# EAGLE board 6up-PA1 (EAGLE 9.4.2)
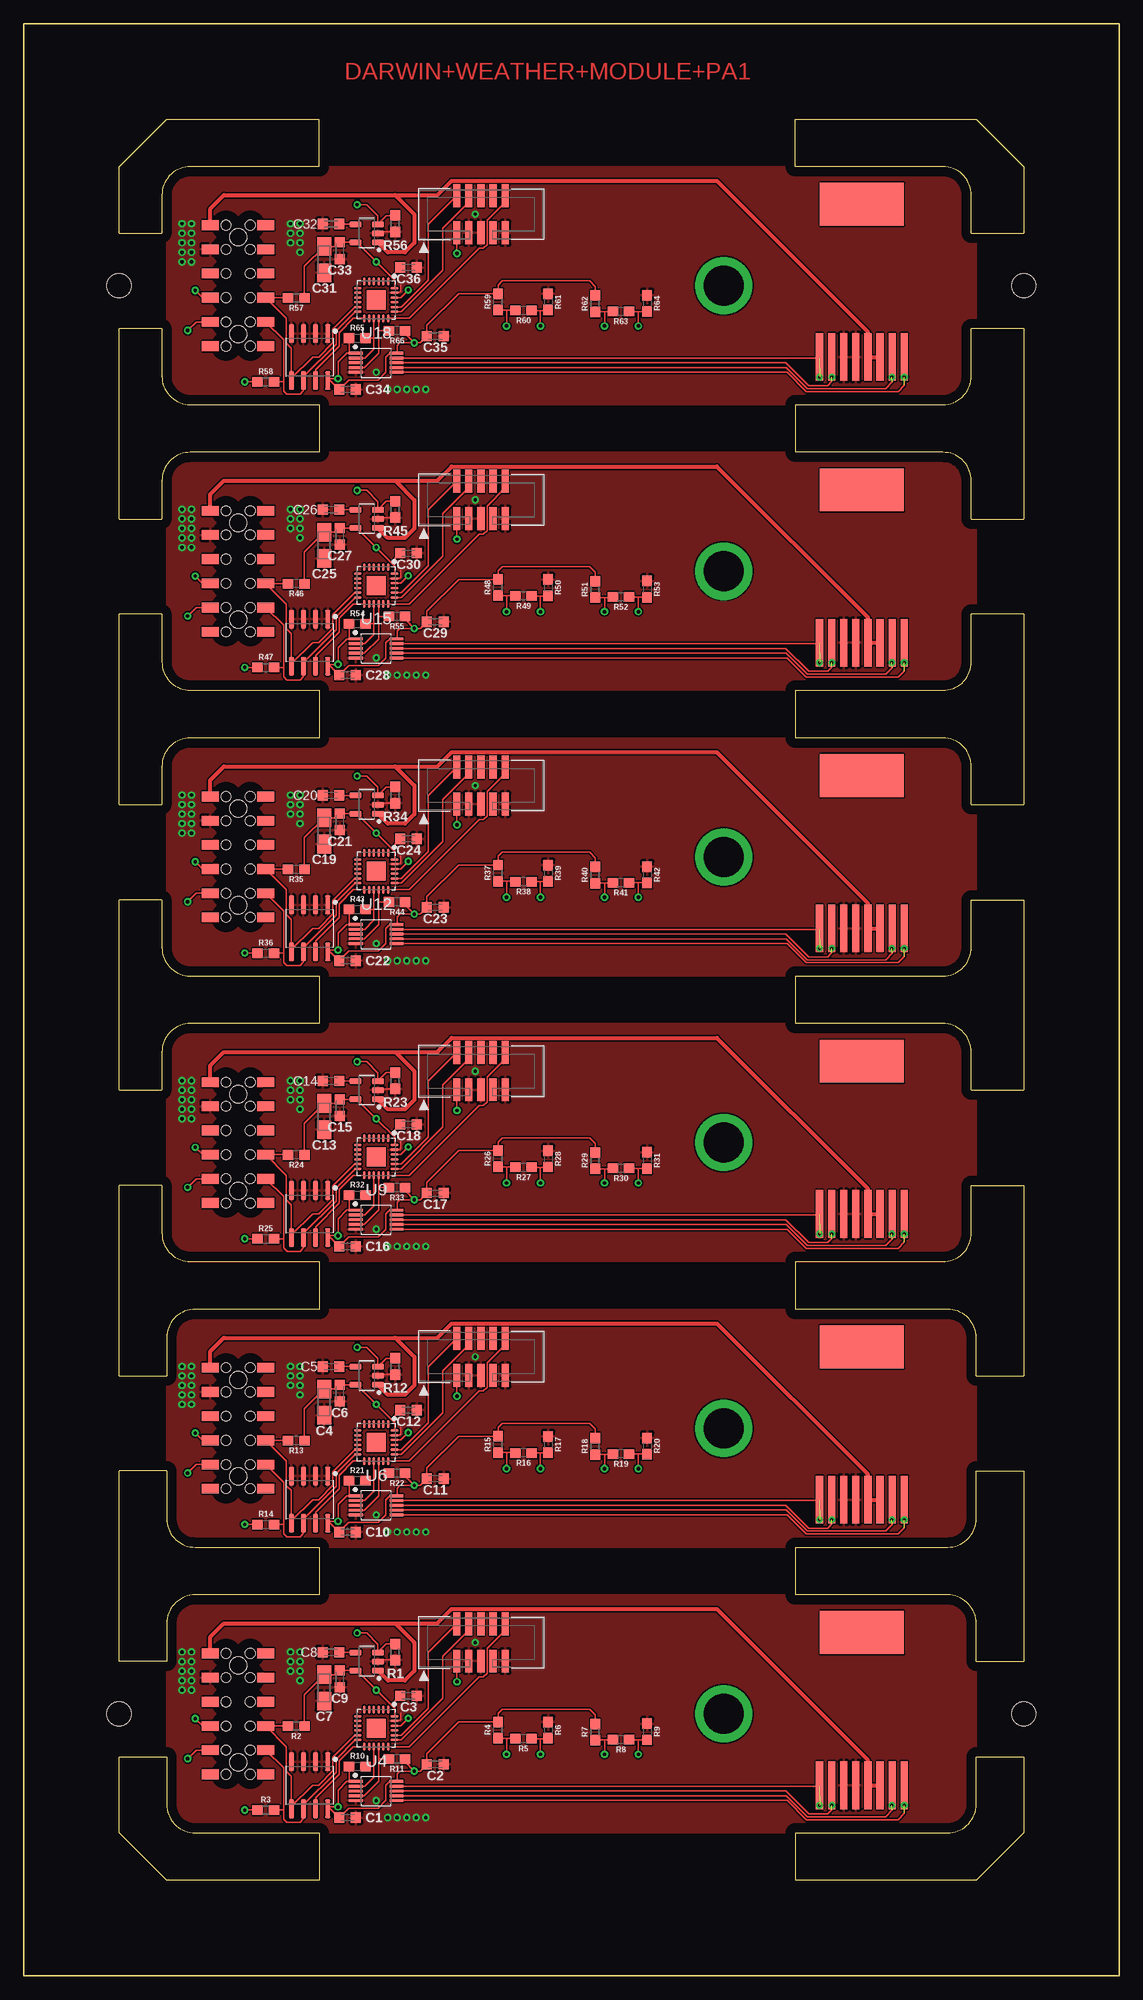
[diagram p0: board, top side]
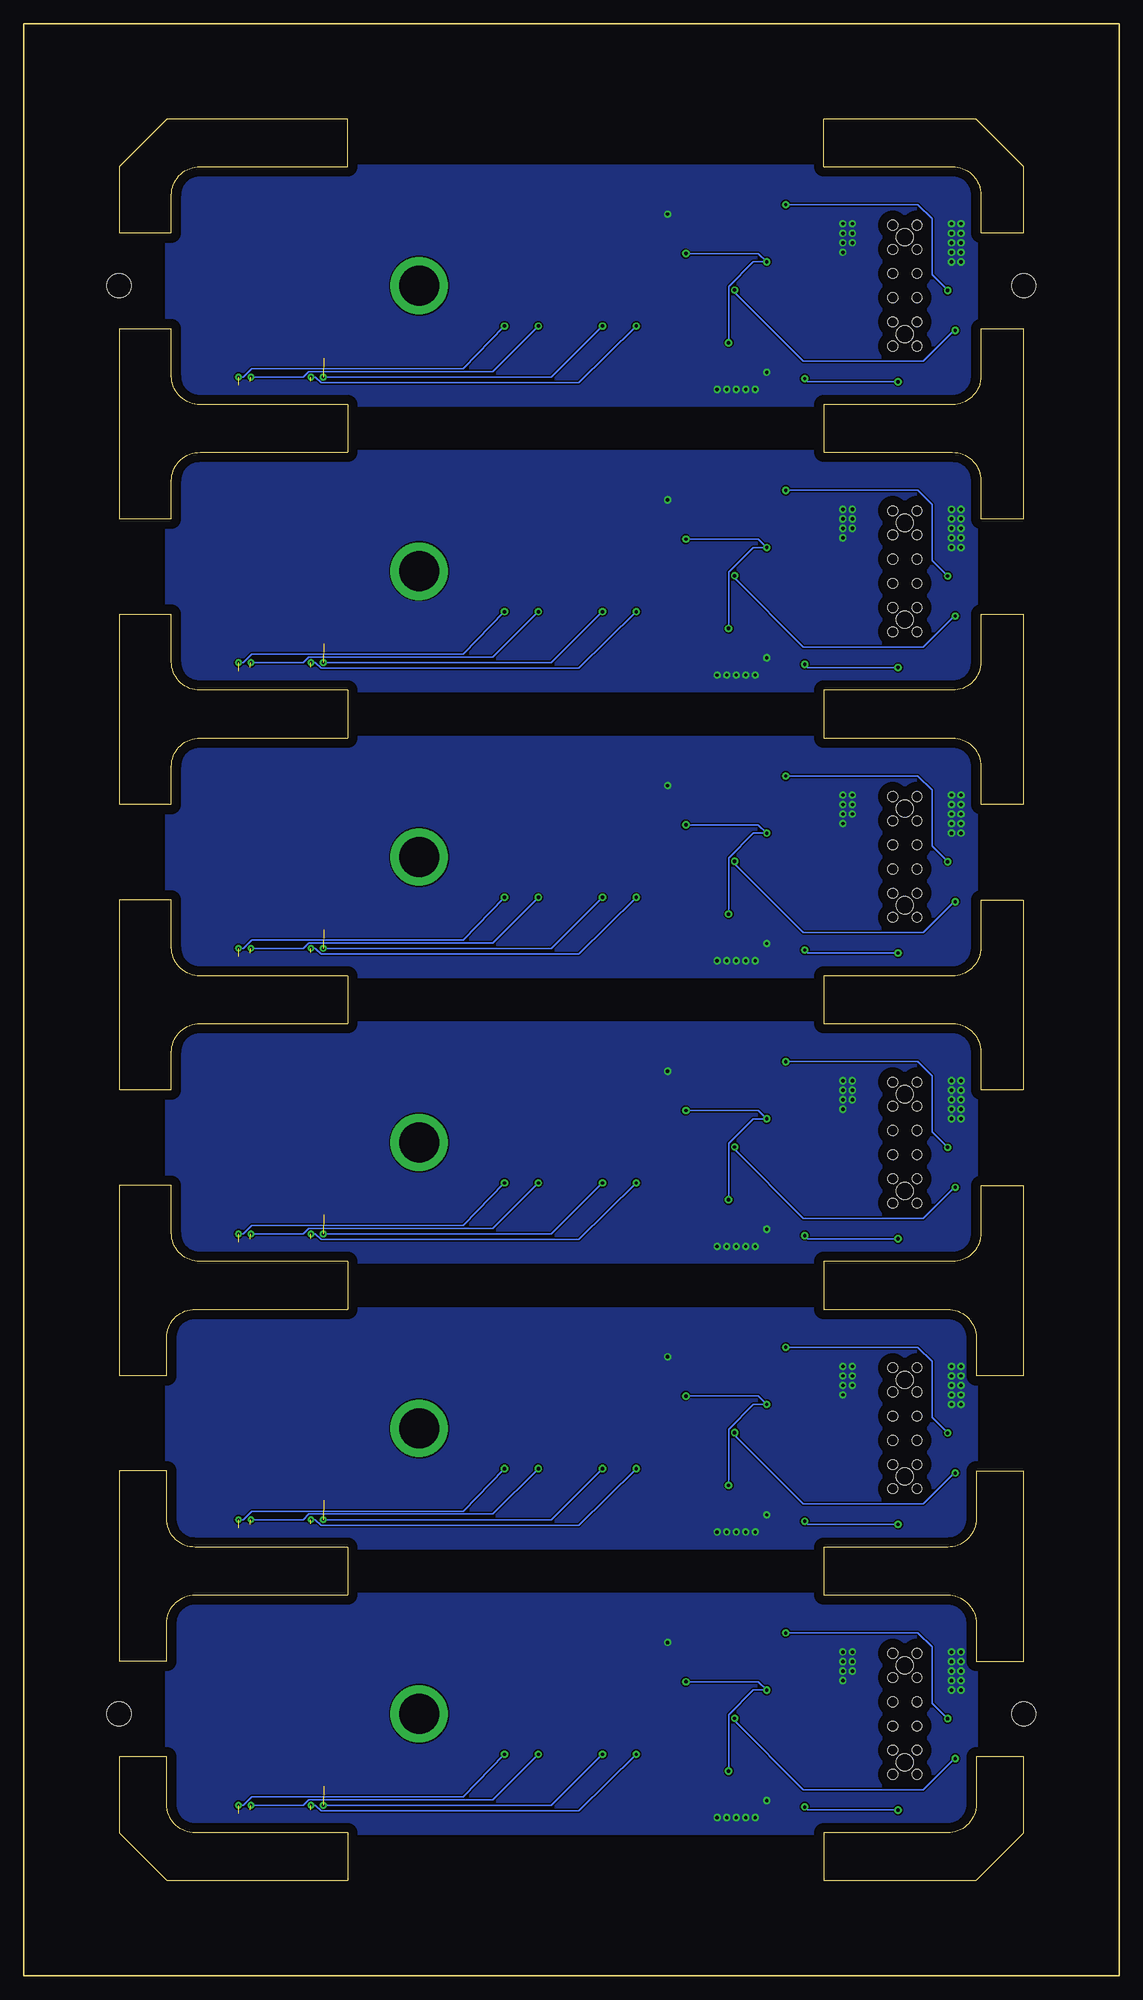
[diagram p1: board, bottom side, seen from below]

Size 115 x 205 mm. Coordinates in mm from the lower left corner, seen from the top.
Outline: 81,10 100,10 105,15 105,23 100,23 100,18 arc-90 97,15 81,15 81,10
Outline: 81,10 81,10
Outline: 15,18 arc90 18,15 31,15 31,10 15,10 10,15 10,23 15,23 15,18
Outline: 100,37 arc90 97,40 81,40 81,45 97,45 arc90 100,48 100,53 105,53 105,33 100,33 100,37
Outline: 18,40 arc90 15,37 15,33 10,33 10,53 15,53 15,48 arc90 18,45 31,45 31,40 18,40
Outline: 100,67 arc90 97,70 81,70 81,75 96.5,75 arc90 99.5,78 99.5,83 105,83 105,63 100,63 100,67
Outline: 18,70 arc90 15,67 15,63 10,63 10,83 14.5,83 14.5,78 arc90 17.5,75 31,75 31,70 18,70
Outline: 99.5,97 arc90 96.5,100 81,100 81,105 96.5,105 arc90 99.5,108 99.5,113 105,113 105,93 99.5,93 99.5,97
Outline: 17.5,100 arc90 14.5,97 14.5,93 10,93 10,113 14.5,113 14.5,108 arc90 17.5,105 31,105 31,100 17.5,100
Outline: 99.5,127 arc90 96.5,130 81,130 81,135 96.5,135 arc90 99.5,138 99.5,143 105,143 105,123 99.5,123 99.5,127
Outline: 17.5,130 arc90 14.5,127 14.5,123 10,123 10,143 14.5,143 14.5,138 arc90 17.5,135 31,135 31,130 17.5,130
Outline: 99.5,157 arc90 96.5,160 81,160 81,165 96.5,165 arc90 99.5,168 99.5,173 105,173 105,153 99.5,153 99.5,157
Outline: 17.5,160 arc90 14.5,157 14.5,153 10,153 10,173 14.5,173 14.5,168 arc90 17.5,165 31,165 31,160 17.5,160
Outline: 99.5,187 arc90 96.5,190 81,190 81,195 100,195 105,190 105,183 99.5,183 99.5,187
Outline: 17.5,190 arc90 14.5,187 14.5,183 10,183 10,190 15,195 31,195 31,190 17.5,190
Outline: 0,0 115,0 115,205 0,205 0,0
Copper layers (1*16): Top 0.035mm / dielectric 1.5mm / Bottom 0.035mm
Design rules "default *": minimum track width 6mil, minimum drill 0.35mm, track to track 6mil, track to pad 6mil, pad to pad 6mil, via to via 6mil, smd to smd 6mil, copper to edge 40mil, drill to drill 6mil, minimum pad ring 10mil, minimum via ring 8mil, stop-mask expansion 4mil, vias tented up to drill 0.35mm, thermal gap 10mil
Holes 2.54 mm at 10,177.5 105,177.5 10,27.5 105,27.5

## Footprints (pad centres in the part's own frame; a part is rotated, then mirrored left to right if it is on the bottom)
C0603K = smd 1.05 x 1.08: 1 -0.875,0; 2 0.875,0
A/3216-18R = smd 1.95 x 1.5: + 1.375,0; - -1.375,0
M20-7810645 = smd 1.02 x 1.78: P$1 -6.35,-2.91; P$2 -3.81,-2.91; P$3 -1.27,-2.91; P$4 1.27,-2.91; P$5 3.81,-2.91; P$6 6.35,-2.91; P$7 6.35,2.91; P$8 3.81,2.91; P$9 1.27,2.91; P$10 -1.27,2.91; P$11 -3.81,2.91; P$12 -6.35,2.91 | hole 1.02: -6.35,1.27; -3.81,1.27; -1.27,1.27; 1.27,1.27; 3.81,1.27; 6.35,1.27; 6.35,-1.27; 3.81,-1.27; 1.27,-1.27; -1.27,-1.27; -3.81,-1.27; -6.35,-1.27 | hole 1.8: -5.08,0; 5.08,0
85513-5009 = smd 0.76 x 5: 1 4.445,0; 2 3.175,0; 3 1.905,0; 4 0.635,0; 5 -0.635,0; 6 -1.905,0; 7 -3.175,0; 8 -4.445,0 | smd 8.8 x 4.5: P$1 0,16.05
0603 = smd 1.1 x 1: 1 -0.85,0; 2 0.85,0
QFN50P400X400X100-25T200 = smd 0.837 x 0.27: 1 -1.937,1.25; 2 -1.937,0.75; 3 -1.937,0.25; 4 -1.937,-0.25; 5 -1.937,-0.75; 6 -1.937,-1.25; 13 1.937,-1.25; 14 1.937,-0.75; 15 1.937,-0.25; 16 1.937,0.25; 17 1.937,0.75; 18 1.937,1.25 | smd 0.27 x 0.837: 7 -1.25,-1.937; 8 -0.75,-1.937; 9 -0.25,-1.937; 10 0.25,-1.937; 11 0.75,-1.937; 12 1.25,-1.937; 19 1.25,1.937; 20 0.75,1.937; 21 0.25,1.937; 22 -0.25,1.937; 23 -0.75,1.937; 24 -1.25,1.937 | smd 2 x 2: 25 0,0
SOIC127P600X175-8 = smd 1.968 x 0.569: 1 -2.473,1.905; 2 -2.473,0.635; 3 -2.473,-0.635; 4 -2.473,-1.905; 5 2.473,-1.905; 6 2.473,-0.635; 7 2.473,0.635; 8 2.473,1.905
SOP50P490X110-10 = smd 1.438 x 0.297: 1 -2.145,1; 2 -2.145,0.5; 3 -2.145,0; 4 -2.145,-0.5; 5 -2.145,-1; 6 2.145,-1; 7 2.145,-0.5; 8 2.145,0; 9 2.145,0.5; 10 2.145,1
SOT95P280X145-5 = smd 1.262 x 0.609: 1 -1.175,0.95; 2 -1.175,0; 3 -1.175,-0.95; 4 1.175,-0.95; 5 1.175,0.95
2X05_1.27MM_BOX_NOPOSTS = smd 0.76 x 2.4: 1 -2.54,-1.95; 2 -2.54,1.95; 3 -1.27,-1.95; 4 -1.27,1.95; 5 0,-1.95; 6 0,1.95; 7 1.27,-1.95; 8 1.27,1.95; 9 2.54,-1.95; 10 2.54,1.95

## Placement (x,y rotation side)
C1  .1uf  [C0603K]  34,16.6 0 top
C2  .1uf  [C0603K]  43.2,22.2 0 top
C3  .1uf  [C0603K]  40.4,29.4 0 top
C4  6.8uf  [A/3216-18R]  31.54,60.23 90 top
C5  [C0603K]  32.25,63.97 180 top
C6  .1uf  [C0603K]  33.17,61.17 270 top
C7  6.8uf  [A/3216-18R]  31.54,30.23 90 top
C8  [C0603K]  32.25,33.97 180 top
C9  .1uf  [C0603K]  33.17,31.18 270 top
C10  .1uf  [C0603K]  34,46.6 0 top
C11  .1uf  [C0603K]  43.2,52.2 0 top
C12  .1uf  [C0603K]  40.4,59.4 0 top
C13  6.8uf  [A/3216-18R]  31.54,90.23 90 top
C14  [C0603K]  32.25,93.97 180 top
C15  .1uf  [C0603K]  33.17,91.17 270 top
C16  .1uf  [C0603K]  34,76.6 0 top
C17  .1uf  [C0603K]  43.2,82.2 0 top
C18  .1uf  [C0603K]  40.4,89.4 0 top
C19  6.8uf  [A/3216-18R]  31.54,120.23 90 top
C20  [C0603K]  32.25,123.97 180 top
C21  .1uf  [C0603K]  33.17,121.17 270 top
C22  .1uf  [C0603K]  34,106.6 0 top
C23  .1uf  [C0603K]  43.2,112.2 0 top
C24  .1uf  [C0603K]  40.4,119.4 0 top
C25  6.8uf  [A/3216-18R]  31.54,150.23 90 top
C26  [C0603K]  32.25,153.97 180 top
C27  .1uf  [C0603K]  33.17,151.18 270 top
C28  .1uf  [C0603K]  34,136.6 0 top
C29  .1uf  [C0603K]  43.2,142.2 0 top
C30  .1uf  [C0603K]  40.4,149.4 0 top
C31  6.8uf  [A/3216-18R]  31.54,180.23 90 top
C32  [C0603K]  32.25,183.97 180 top
C33  .1uf  [C0603K]  33.17,181.18 270 top
C34  .1uf  [C0603K]  34,166.6 0 top
C35  .1uf  [C0603K]  43.2,172.2 0 top
C36  .1uf  [C0603K]  40.4,179.4 0 top
J1  2X6-HEADERS  [M20-7810645]  22.5,27.5 90 top
J2  95501-6889VERT  [85513-5009]  88,20 0 top
J3  2X6-HEADERS  [M20-7810645]  22.5,57.5 90 top
J4  95501-6889VERT  [85513-5009]  88,50 0 top
J5  2X6-HEADERS  [M20-7810645]  22.5,87.5 90 top
J6  95501-6889VERT  [85513-5009]  88,80 0 top
J7  2X6-HEADERS  [M20-7810645]  22.5,117.5 90 top
J8  95501-6889VERT  [85513-5009]  88,110 0 top
J9  2X6-HEADERS  [M20-7810645]  22.5,147.5 90 top
J10  95501-6889VERT  [85513-5009]  88,140 0 top
J11  2X6-HEADERS  [M20-7810645]  22.5,177.5 90 top
J12  95501-6889VERT  [85513-5009]  88,170 0 top
R1  100k  [0603]  39,34 90 top
R2  4.7k  [0603]  28.6,26.2 180 top
R3  4.7k  [0603]  25.4,17.4 0 top
R4  330  [0603]  49.8,25.8 90 top
R5  100  [0603]  52.46,24.89 180 top
R6  300  [0603]  55.06,25.79 270 top
R7  330  [0603]  60,25.6 90 top
R8  100  [0603]  62.69,24.79 180 top
R9  300  [0603]  65.45,25.62 270 top
R10  4.7k  [0603]  35.02,21.98 0 top
R11  4.7k  [0603]  39.18,22.76 180 top
R12  100k  [0603]  39,64 90 top
R13  4.7k  [0603]  28.6,56.2 180 top
R14  4.7k  [0603]  25.4,47.4 0 top
R15  330  [0603]  49.8,55.8 90 top
R16  100  [0603]  52.46,54.9 180 top
R17  300  [0603]  55.06,55.79 270 top
R18  330  [0603]  60,55.6 90 top
R19  100  [0603]  62.69,54.79 180 top
R20  300  [0603]  65.45,55.62 270 top
R21  4.7k  [0603]  35.02,51.98 0 top
R22  4.7k  [0603]  39.18,52.76 180 top
R23  100k  [0603]  39,94 90 top
R24  4.7k  [0603]  28.6,86.2 180 top
R25  4.7k  [0603]  25.4,77.4 0 top
R26  330  [0603]  49.8,85.8 90 top
R27  100  [0603]  52.46,84.89 180 top
R28  300  [0603]  55.06,85.79 270 top
R29  330  [0603]  60,85.6 90 top
R30  100  [0603]  62.69,84.79 180 top
R31  300  [0603]  65.45,85.62 270 top
R32  4.7k  [0603]  35.02,81.98 0 top
R33  4.7k  [0603]  39.18,82.76 180 top
R34  100k  [0603]  39,124 90 top
R35  4.7k  [0603]  28.6,116.2 180 top
R36  4.7k  [0603]  25.4,107.4 0 top
R37  330  [0603]  49.8,115.8 90 top
R38  100  [0603]  52.46,114.89 180 top
R39  300  [0603]  55.06,115.79 270 top
R40  330  [0603]  60,115.6 90 top
R41  100  [0603]  62.69,114.79 180 top
R42  300  [0603]  65.45,115.62 270 top
R43  4.7k  [0603]  35.02,111.98 0 top
R44  4.7k  [0603]  39.18,112.76 180 top
R45  100k  [0603]  39,154 90 top
R46  4.7k  [0603]  28.6,146.2 180 top
R47  4.7k  [0603]  25.4,137.4 0 top
R48  330  [0603]  49.8,145.8 90 top
R49  100  [0603]  52.46,144.9 180 top
R50  300  [0603]  55.06,145.79 270 top
R51  330  [0603]  60,145.6 90 top
R52  100  [0603]  62.69,144.79 180 top
R53  300  [0603]  65.45,145.62 270 top
R54  4.7k  [0603]  35.02,141.98 0 top
R55  4.7k  [0603]  39.18,142.76 180 top
R56  100k  [0603]  39,184 90 top
R57  4.7k  [0603]  28.6,176.2 180 top
R58  4.7k  [0603]  25.4,167.4 0 top
R59  330  [0603]  49.8,175.8 90 top
R60  100  [0603]  52.46,174.9 180 top
R61  300  [0603]  55.06,175.79 270 top
R62  330  [0603]  60,175.6 90 top
R63  100  [0603]  62.69,174.79 180 top
R64  300  [0603]  65.45,175.62 270 top
R65  4.7k  [0603]  35.02,171.98 0 top
R66  4.7k  [0603]  39.18,172.76 180 top
U1  ATSAMD09  [QFN50P400X400X100-25T200]  37,56 270 top
U2  ATSAMD09  [QFN50P400X400X100-25T200]  37,26 270 top
U3  M24C02-WMN6TP  [SOIC127P600X175-8]  30,20 270 top
U4  PCA9615  [SOP50P490X110-10]  37,19.4 0 top
U5  M24C02-WMN6TP  [SOIC127P600X175-8]  30,50 270 top
U6  PCA9615  [SOP50P490X110-10]  37,49.4 0 top
U7  ATSAMD09  [QFN50P400X400X100-25T200]  37,86 270 top
U8  M24C02-WMN6TP  [SOIC127P600X175-8]  30,80 270 top
U9  PCA9615  [SOP50P490X110-10]  37,79.4 0 top
U10  ATSAMD09  [QFN50P400X400X100-25T200]  37,116 270 top
U11  M24C02-WMN6TP  [SOIC127P600X175-8]  30,110 270 top
U12  PCA9615  [SOP50P490X110-10]  37,109.4 0 top
U13  ATSAMD09  [QFN50P400X400X100-25T200]  37,146 270 top
U14  M24C02-WMN6TP  [SOIC127P600X175-8]  30,140 270 top
U15  PCA9615  [SOP50P490X110-10]  37,139.4 0 top
U16  ATSAMD09  [QFN50P400X400X100-25T200]  37,176 270 top
U17  M24C02-WMN6TP  [SOIC127P600X175-8]  30,170 270 top
U18  PCA9615  [SOP50P490X110-10]  37,169.4 0 top
U$1  MIC5219-3.3YM5-TR  [SOT95P280X145-5]  36,63 180 top
U$2  MIC5219-3.3YM5-TR  [SOT95P280X145-5]  36,93 180 top
U$3  MIC5219-3.3YM5-TR  [SOT95P280X145-5]  36,123 180 top
U$4  MIC5219-3.3YM5-TR  [SOT95P280X145-5]  36,33 180 top
U$5  MIC5219-3.3YM5-TR  [SOT95P280X145-5]  36,153 180 top
U$6  MIC5219-3.3YM5-TR  [SOT95P280X145-5]  36,183 180 top
X1  [2X05_1.27MM_BOX_NOPOSTS]  48,35 0 top
X2  [2X05_1.27MM_BOX_NOPOSTS]  48,65 0 top
X3  [2X05_1.27MM_BOX_NOPOSTS]  48,95 0 top
X4  [2X05_1.27MM_BOX_NOPOSTS]  48,125 0 top
X5  [2X05_1.27MM_BOX_NOPOSTS]  48,155 0 top
X6  [2X05_1.27MM_BOX_NOPOSTS]  48,185 0 top

## Library data of the parts
C1-C36 = rcl; SPICEPREFIX: C
J1-J12 U1-U18 U$1-U$6 = Conservify
R1-R66 = SparkFun-Resistors; PROD_ID: RES-07828
X1-X6 = microbuilder

## Nets
3V1: C4.+ C6.1 C10.1 C11.1 C12.1 R13.1 R14.1 R15.2 R18.2 R21.1 R22.1 U1.24 U5.8 U6.1 U6.10 U$1.5 X2.1
3V2: C13.+ C15.1 C16.1 C17.1 C18.1 R24.1 R25.1 R26.2 R29.2 R32.1 R33.1 U7.24 U8.8 U9.1 U9.10 U$2.5 X3.1
3V3: C1.1 C2.1 C3.1 C7.+ C9.1 R2.1 R3.1 R4.2 R7.2 R10.1 R11.1 U2.24 U3.8 U4.1 U4.10 U$4.5 X1.1
3V4: C19.+ C21.1 C22.1 C23.1 C24.1 R35.1 R36.1 R37.2 R40.2 R43.1 R44.1 U10.24 U11.8 U12.1 U12.10 U$3.5 X4.1
3V5: C25.+ C27.1 C28.1 C29.1 C30.1 R46.1 R47.1 R48.2 R51.2 R54.1 R55.1 U13.24 U14.8 U15.1 U15.10 U$5.5 X5.1
3V6: C31.+ C33.1 C34.1 C35.1 C36.1 R57.1 R58.1 R59.2 R62.2 R65.1 R66.1 U16.24 U17.8 U18.1 U18.10 U$6.5 X6.1
EN: U4.3
EN1: U6.3
EN2: U9.3
EN3: U12.3
EN4: U15.3
EN5: U18.3
ENABLE: J1.P$10 R1.2 U$4.3
ENABLE1: J3.P$10 R12.2 U$1.3
ENABLE2: J5.P$10 R23.2 U$2.3
ENABLE3: J7.P$10 R34.2 U$3.3
ENABLE4: J9.P$10 R45.2 U$5.3
ENABLE5: J11.P$10 R56.2 U$6.3
G1: J1.P$11 U2.22
G2: J1.P$12
G3: J3.P$11 U1.22
G4: J3.P$12
G5: J5.P$11 U7.22
G6: J5.P$12
G7: J7.P$11 U10.22
G8: J7.P$12
G9: J9.P$11 U13.22
G10: J9.P$12
G11: J11.P$11 U16.22
G12: J11.P$12
GND: C1.2 C2.2 C3.2 C7.- C8.2 C9.2 J1.P$8 J2.5 J2.6 R1.1 R6.1 R9.1 U2.23 U3.1 U3.2 U3.3 U3.4 U4.5 U$4.2 X1.3 X1.5 X1.9
GND1: C4.- C5.2 C6.2 C10.2 C11.2 C12.2 J3.P$8 J4.5 J4.6 R12.1 R17.1 R20.1 U1.23 U5.1 U5.2 U5.3 U5.4 U6.5 U$1.2 X2.3 X2.5 X2.9
GND2: C13.- C14.2 C15.2 C16.2 C17.2 C18.2 J5.P$8 J6.5 J6.6 R23.1 R28.1 R31.1 U7.23 U8.1 U8.2 U8.3 U8.4 U9.5 U$2.2 X3.3 X3.5 X3.9
GND3: C19.- C20.2 C21.2 C22.2 C23.2 C24.2 J7.P$8 J8.5 J8.6 R34.1 R39.1 R42.1 U10.23 U11.1 U11.2 U11.3 U11.4 U12.5 U$3.2 X4.3 X4.5 X4.9
GND4: C25.- C26.2 C27.2 C28.2 C29.2 C30.2 J9.P$8 J10.5 J10.6 R45.1 R50.1 R53.1 U13.23 U14.1 U14.2 U14.3 U14.4 U15.5 U$5.2 X5.3 X5.5 X5.9
GND5: C31.- C32.2 C33.2 C34.2 C35.2 C36.2 J11.P$8 J12.5 J12.6 R56.1 R61.1 R64.1 U16.23 U17.1 U17.2 U17.3 U17.4 U18.5 U$6.2 X6.3 X6.5 X6.9
IN3V1: J3.P$9
IN3V2: J5.P$9
IN3V3: J1.P$9
IN3V4: J7.P$9
IN3V5: J9.P$9
IN3V6: J11.P$9
KEY: X1.7
KEY1: X2.7
KEY2: X3.7
KEY3: X4.7
KEY4: X5.7
KEY5: X6.7
LCL-M: J2.1 R8.1 R9.2 U4.6
LCL-M1: J4.1 R19.1 R20.2 U6.6
LCL-M2: J6.1 R30.1 R31.2 U9.6
LCL-M3: J8.1 R41.1 R42.2 U12.6
LCL-M4: J10.1 R52.1 R53.2 U15.6
LCL-M5: J12.1 R63.1 R64.2 U18.6
LCL-P: J2.2 R7.1 R8.2 U4.7
LCL-P1: J4.2 R18.1 R19.2 U6.7
LCL-P2: J6.2 R29.1 R30.2 U9.7
LCL-P3: J8.2 R40.1 R41.2 U12.7
LCL-P4: J10.2 R51.1 R52.2 U15.7
LCL-P5: J12.2 R62.1 R63.2 U18.7
LDA-M: J2.8 R5.1 R6.2 U4.9
LDA-M1: J4.8 R16.1 R17.2 U6.9
LDA-M2: J6.8 R27.1 R28.2 U9.9
LDA-M3: J8.8 R38.1 R39.2 U12.9
LDA-M4: J10.8 R49.1 R50.2 U15.9
LDA-M5: J12.8 R60.1 R61.2 U18.9
LDA-P: J2.7 R4.1 R5.2 U4.8
LDA-P1: J4.7 R15.1 R16.2 U6.8
LDA-P2: J6.7 R26.1 R27.2 U9.8
LDA-P3: J8.7 R37.1 R38.2 U12.8
LDA-P4: J10.7 R48.1 R49.2 U15.8
LDA-P5: J12.7 R59.1 R60.2 U18.8
MISO: J1.P$4
MISO1: J3.P$4
MISO2: J5.P$4
MISO3: J7.P$4
MISO4: J9.P$4
MISO5: J11.P$4
MOSI: J1.P$5
MOSI1: J3.P$5
MOSI2: J5.P$5
MOSI3: J7.P$5
MOSI4: J9.P$5
MOSI5: J11.P$5
N$3: C5.1 U$1.4
N$5: C14.1 U$2.4
N$6: C8.1 U$4.4
N$8: C20.1 U$3.4
N$10: C26.1 U$5.4
N$12: C32.1 U$6.4
NC: J1.P$1
NC1: J3.P$1
NC2: J5.P$1
NC3: J7.P$1
NC4: J9.P$1
NC5: J11.P$1
RESET: U2.18 X1.10
RESET1: U1.18 X2.10
RESET2: U7.18 X3.10
RESET3: U10.18 X4.10
RESET4: U13.18 X5.10
RESET5: U16.18 X6.10
SCK: J1.P$6
SCK1: J3.P$6
SCK2: J5.P$6
SCK3: J7.P$6
SCK4: J9.P$6
SCK5: J11.P$6
SCL: J1.P$2 R3.2 U2.12 U3.6
SCL1: J3.P$2 R14.2 U1.12 U5.6
SCL2: J5.P$2 R25.2 U7.12 U8.6
SCL3: J7.P$2 R36.2 U10.12 U11.6
SCL4: J9.P$2 R47.2 U13.12 U14.6
SCL5: J11.P$2 R58.2 U16.12 U17.6
SDA: J1.P$3 R2.2 U2.11 U3.5
SDA1: J3.P$3 R13.2 U1.11 U5.5
SDA2: J5.P$3 R24.2 U7.11 U8.5
SDA3: J7.P$3 R35.2 U10.11 U11.5
SDA4: J9.P$3 R46.2 U13.11 U14.5
SDA5: J11.P$3 R57.2 U16.11 U17.5
SENSE-SCL: R11.2 U2.16 U4.4
SENSE-SCL1: R22.2 U1.16 U6.4
SENSE-SCL2: R33.2 U7.16 U9.4
SENSE-SCL3: R44.2 U10.16 U12.4
SENSE-SCL4: R55.2 U13.16 U15.4
SENSE-SCL5: R66.2 U16.16 U18.4
SENSE-SDA: R10.2 U2.15 U4.2
SENSE-SDA1: R21.2 U1.15 U6.2
SENSE-SDA2: R32.2 U7.15 U9.2
SENSE-SDA3: R43.2 U10.15 U12.2
SENSE-SDA4: R54.2 U13.15 U15.2
SENSE-SDA5: R65.2 U16.15 U18.2
SWCLK: U2.19 X1.4
SWCLK1: U1.19 X2.4
SWCLK2: U7.19 X3.4
SWCLK3: U10.19 X4.4
SWCLK4: U13.19 X5.4
SWCLK5: U16.19 X6.4
SWDIO: U2.20 X1.2
SWDIO1: U1.20 X2.2
SWDIO2: U7.20 X3.2
SWDIO3: U10.20 X4.2
SWDIO4: U13.20 X5.2
SWDIO5: U16.20 X6.2
SWO: X1.6
SWO1: X2.6
SWO2: X3.6
SWO3: X4.6
SWO4: X5.6
SWO5: X6.6
TDI: X1.8
TDI1: X2.8
TDI2: X3.8
TDI3: X4.8
TDI4: X5.8
TDI5: X6.8
UNREG: J1.P$7 J2.3 J2.4 U$4.1
UNREG1: J3.P$7 J4.3 J4.4 U$1.1
UNREG2: J5.P$7 J6.3 J6.4 U$2.1
UNREG3: J7.P$7 J8.3 J8.4 U$3.1
UNREG4: J9.P$7 J10.3 J10.4 U$5.1
UNREG5: J11.P$7 J12.3 J12.4 U$6.1
WC: U2.13 U3.7
WC1: U1.13 U5.7
WC2: U7.13 U8.7
WC3: U10.13 U11.7
WC4: U13.13 U14.7
WC5: U16.13 U17.7

## Tracks (layer width: path | path; a pad name or v marks a point on that pad's centre or on a via)
3V1  (via drill 0.35)
  Top 0.152: 38.94,58.06 v37,60 34.95,62.05 U$1.5 C6.1 32.73,61.61 C4.+ 29.45,59.52 R13.1 | 38.94,58.06 U1.24 | v45.48,60.88 45.46,60.9 X2.1 | C12.1 38.94,58.81 38.94,58.06 | v41,51.49 41.62,51.49 C11.1 42.33,53.33 45.65,56.65 R15.2 49.8,57.58 50.23,58 59.4,58 60,57.4 R18.2 | 32.2,47.53 C10.1 34.12,47.6 37.2,47.6 38,48.4 38,50 38.4,50.4 U6.10 39.2,50.45 39.2,51.2 39.49,51.49 v41,51.49 | 32.2,47.53 32,47.73 v33,47.73 33,49.49 33.91,50.4 34.22,50.4 | 32.2,47.53 U5.8 | R14.1 v23.2,47.4 | 34.22,50.4 U6.1 | R22.1 40.03,52.46 v41,51.49 | R21.1 34.17,50.46 34.22,50.4
  Bottom 0.152: v41,51.49 41,57.4 38.4,60 v37,60 37.88,60.88 v45.48,60.88 | v23.2,47.4 32.67,47.4 v33,47.73
3V2  (via drill 0.35)
  Top 0.152: 38.94,88.06 v37,90 34.95,92.05 U$2.5 C15.1 32.73,91.61 C13.+ 29.45,89.52 R24.1 | 38.94,88.06 U7.24 | v45.48,90.88 45.46,90.89 X3.1 | C18.1 38.94,88.81 38.94,88.06 | v41,81.49 41.62,81.49 C17.1 42.33,83.33 45.65,86.65 R26.2 49.8,87.58 50.23,88 59.4,88 60,87.4 R29.2 | 32.2,77.53 C16.1 34.12,77.6 37.2,77.6 38,78.4 38,80 38.4,80.4 U9.10 39.2,80.45 39.2,81.2 39.49,81.49 v41,81.49 | 32.2,77.53 32,77.73 v33,77.73 33,79.49 33.91,80.4 34.22,80.4 | 32.2,77.53 U8.8 | R25.1 v23.2,77.4 | 34.22,80.4 U9.1 | R33.1 40.03,82.46 v41,81.49 | R32.1 34.17,80.46 34.22,80.4
  Bottom 0.152: v41,81.49 41,87.4 38.4,90 v37,90 37.88,90.88 v45.48,90.88 | v23.2,77.4 32.67,77.4 v33,77.73
3V3  (via drill 0.35)
  Top 0.152: 38.94,28.06 v37,30 34.95,32.05 U$4.5 C9.1 32.73,31.61 C7.+ 29.45,29.52 R2.1 | 38.94,28.06 U2.24 | v45.48,30.88 45.46,30.89 X1.1 | C3.1 38.94,28.81 38.94,28.06 | v41,21.49 41.62,21.49 C2.1 42.33,23.32 45.65,26.65 R4.2 49.8,27.57 50.23,28 59.4,28 60,27.4 R7.2 | 32.2,17.53 C1.1 34.12,17.6 37.2,17.6 38,18.4 38,20 38.4,20.4 U4.10 39.2,20.45 39.2,21.2 39.49,21.49 v41,21.49 | 32.2,17.53 32,17.73 v33,17.73 33,19.49 33.91,20.4 34.22,20.4 | 32.2,17.53 U3.8 | R3.1 v23.2,17.4 | 34.22,20.4 U4.1 | R11.1 40.03,22.46 v41,21.49 | R10.1 34.17,20.46 34.22,20.4
  Bottom 0.152: v41,21.49 41,27.4 38.4,30 v37,30 37.88,30.88 v45.48,30.88 | v23.2,17.4 32.67,17.4 v33,17.73
3V4  (via drill 0.35)
  Top 0.152: 38.94,118.06 v37,120 34.95,122.05 U$3.5 C21.1 32.73,121.61 C19.+ 29.45,119.52 R35.1 | 38.94,118.06 U10.24 | v45.48,120.88 45.46,120.89 X4.1 | C24.1 38.94,118.81 38.94,118.06 | v41,111.49 41.62,111.49 C23.1 42.33,113.33 45.65,116.65 R37.2 49.8,117.58 50.23,118 59.4,118 60,117.4 R40.2 | 32.2,107.53 C22.1 34.12,107.6 37.2,107.6 38,108.4 38,110 38.4,110.4 U12.10 39.2,110.45 39.2,111.2 39.49,111.49 v41,111.49 | 32.2,107.53 32,107.73 v33,107.73 33,109.49 33.91,110.4 34.22,110.4 | 32.2,107.53 U11.8 | R36.1 v23.2,107.4 | 34.22,110.4 U12.1 | R44.1 40.03,112.46 v41,111.49 | R43.1 34.17,110.46 34.22,110.4
  Bottom 0.152: v41,111.49 41,117.4 38.4,120 v37,120 37.88,120.88 v45.48,120.88 | v23.2,107.4 32.67,107.4 v33,107.73
3V5  (via drill 0.35)
  Top 0.152: 38.94,148.06 v37,150 34.95,152.05 U$5.5 C27.1 32.73,151.61 C25.+ 29.45,149.52 R46.1 | 38.94,148.06 U13.24 | v45.48,150.88 45.46,150.9 X5.1 | C30.1 38.94,148.81 38.94,148.06 | v41,141.49 41.62,141.49 C29.1 42.33,143.32 45.65,146.65 R48.2 49.8,147.57 50.23,148 59.4,148 60,147.4 R51.2 | 32.2,137.53 C28.1 34.12,137.6 37.2,137.6 38,138.4 38,140 38.4,140.4 U15.10 39.2,140.46 39.2,141.2 39.49,141.49 v41,141.49 | 32.2,137.53 32,137.73 v33,137.73 33,139.49 33.91,140.4 34.22,140.4 | 32.2,137.53 U14.8 | R47.1 v23.2,137.4 | 34.22,140.4 U15.1 | R55.1 40.03,142.46 v41,141.49 | R54.1 34.17,140.46 34.22,140.4
  Bottom 0.152: v41,141.49 41,147.4 38.4,150 v37,150 37.88,150.88 v45.48,150.88 | v23.2,137.4 32.67,137.4 v33,137.73
3V6  (via drill 0.35)
  Top 0.152: 38.94,178.06 v37,180 34.95,182.05 U$6.5 C33.1 32.73,181.61 C31.+ 29.45,179.52 R57.1 | 38.94,178.06 U16.24 | v45.48,180.88 45.46,180.9 X6.1 | C36.1 38.94,178.81 38.94,178.06 | v41,171.49 41.62,171.49 C35.1 42.33,173.32 45.65,176.65 R59.2 49.8,177.57 50.23,178 59.4,178 60,177.4 R62.2 | 32.2,167.53 C34.1 34.12,167.6 37.2,167.6 38,168.4 38,170 38.4,170.4 U18.10 39.2,170.46 39.2,171.2 39.49,171.49 v41,171.49 | 32.2,167.53 32,167.73 v33,167.73 33,169.49 33.91,170.4 34.22,170.4 | 32.2,167.53 U17.8 | R58.1 v23.2,167.4 | 34.22,170.4 U18.1 | R66.1 40.03,172.46 v41,171.49 | R65.1 34.17,170.46 34.22,170.4
  Bottom 0.152: v41,171.49 41,177.4 38.4,180 v37,180 37.88,180.88 v45.48,180.88 | v23.2,167.4 32.67,167.4 v33,167.73
ENABLE  (via drill 0.35)
  Top 0.152: R1.2 38.08,34.85 U$4.3 37.17,34.83 36,36 v35,36 | J1.P$10 18.77,26.23 v18,27
  Bottom 0.152: v18,27 19.63,28.63 19.63,34.51 21.11,36 v35,36
ENABLE1  (via drill 0.35)
  Top 0.152: R12.2 38.08,64.85 U$1.3 37.17,64.83 36,66 v35,66 | J3.P$10 18.77,56.23 v18,57
  Bottom 0.152: v18,57 19.63,58.63 19.63,64.51 21.11,66 v35,66
ENABLE2  (via drill 0.35)
  Top 0.152: R23.2 38.08,94.85 U$2.3 37.17,94.83 36,96 v35,96 | J5.P$10 18.77,86.23 v18,87
  Bottom 0.152: v18,87 19.63,88.63 19.63,94.51 21.11,96 v35,96
ENABLE3  (via drill 0.35)
  Top 0.152: R34.2 38.08,124.85 U$3.3 37.17,124.83 36,126 v35,126 | J7.P$10 18.77,116.23 v18,117
  Bottom 0.152: v18,117 19.63,118.63 19.63,124.51 21.11,126 v35,126
ENABLE4  (via drill 0.35)
  Top 0.152: R45.2 38.08,154.85 U$5.3 37.17,154.82 36,156 v35,156 | J9.P$10 18.77,146.23 v18,147
  Bottom 0.152: v18,147 19.63,148.63 19.63,154.51 21.11,156 v35,156
ENABLE5  (via drill 0.35)
  Top 0.152: R56.2 38.08,184.85 U$6.3 37.17,184.82 36,186 v35,186 | J11.P$10 18.77,176.23 v18,177
  Bottom 0.152: v18,177 19.63,178.63 19.63,184.51 21.11,186 v35,186
G1  (via drill 0.35)
  Top 0.152: J1.P$11 18.09,23.69 v17.2,22.8 | v40.36,27.04 39.58,26.25 U2.22
  Bottom 0.152: v17.2,22.8 17.31,22.8 20.57,19.55 33.15,19.55 40.36,26.76 v40.36,27.04
G3  (via drill 0.35)
  Top 0.152: J3.P$11 18.09,53.69 v17.2,52.8 | v40.36,57.04 39.58,56.25 U1.22
  Bottom 0.152: v17.2,52.8 17.31,52.8 20.57,49.55 33.15,49.55 40.36,56.76 v40.36,57.04
G5  (via drill 0.35)
  Top 0.152: J5.P$11 18.09,83.69 v17.2,82.8 | v40.36,87.04 39.58,86.25 U7.22
  Bottom 0.152: v17.2,82.8 17.31,82.8 20.57,79.55 33.15,79.55 40.36,86.76 v40.36,87.04
G7  (via drill 0.35)
  Top 0.152: J7.P$11 18.09,113.69 v17.2,112.8 | v40.36,117.04 39.58,116.25 U10.22
  Bottom 0.152: v17.2,112.8 17.31,112.8 20.57,109.55 33.15,109.55 40.36,116.76 v40.36,117.04
G9  (via drill 0.35)
  Top 0.152: J9.P$11 18.09,143.69 v17.2,142.8 | v40.36,147.04 39.58,146.25 U13.22
  Bottom 0.152: v17.2,142.8 17.31,142.8 20.57,139.55 33.15,139.55 40.36,146.76 v40.36,147.04
G11  (via drill 0.35)
  Top 0.152: J11.P$11 18.09,173.69 v17.2,172.8 | v40.36,177.04 39.58,176.25 U16.22
  Bottom 0.152: v17.2,172.8 17.31,172.8 20.57,169.55 33.15,169.55 40.36,176.76 v40.36,177.04
GND  (via drill 0.35)
  Top 0.152: U$4.2 37.33,33.15 R1.1 | U2.23 38.99,26.8 39.48,26.8 39.6,26.91 39.6,27.6
  other vias: 28,34 29,34 29,33 28,33 29,32 28,32 29,31 16.6,34 16.6,33 16.6,32 16.6,31 16.6,30 17.6,34 17.6,33 17.6,32 17.6,31 17.6,30 37,18.4 47.4,35 42.2,16.6 38.2,16.6 39.2,16.6 40.2,16.6 41.2,16.6
  pour Top: 15,40 100,40 100,15 15,15
  pour Bottom: 15,40 100,40 100,15 15,15
GND1  (via drill 0.35)
  Top 0.152: U$1.2 37.33,63.15 R12.1 | U1.23 38.99,56.8 39.48,56.8 39.6,56.91 39.6,57.6
  other vias: 28,64 29,64 29,63 28,63 29,62 28,62 29,61 16.6,64 16.6,63 16.6,62 16.6,61 16.6,60 17.6,64 17.6,63 17.6,62 17.6,61 17.6,60 37,48.4 47.4,65 42.2,46.6 38.2,46.6 39.2,46.6 40.2,46.6 41.2,46.6
  pour Top: 15,70 100,70 100,45 15,45
  pour Bottom: 15,70 100,70 100,45 15,45
GND2  (via drill 0.35)
  Top 0.152: U$2.2 37.33,93.15 R23.1 | U7.23 38.99,86.8 39.48,86.8 39.6,86.92 39.6,87.6
  other vias: 28,94 29,94 29,93 28,93 29,92 28,92 29,91 16.6,94 16.6,93 16.6,92 16.6,91 16.6,90 17.6,94 17.6,93 17.6,92 17.6,91 17.6,90 37,78.4 47.4,95 42.2,76.6 38.2,76.6 39.2,76.6 40.2,76.6 41.2,76.6
  pour Top: 15,100 100,100 100,75 15,75
  pour Bottom: 15,100 100,100 100,75 15,75
GND3  (via drill 0.35)
  Top 0.152: U$3.2 37.33,123.15 R34.1 | U10.23 38.99,116.8 39.48,116.8 39.6,116.92 39.6,117.6
  other vias: 28,124 29,124 29,123 28,123 29,122 28,122 29,121 16.6,124 16.6,123 16.6,122 16.6,121 16.6,120 17.6,124 17.6,123 17.6,122 17.6,121 17.6,120 37,108.4 47.4,125 42.2,106.6 38.2,106.6 39.2,106.6 40.2,106.6 41.2,106.6
  pour Top: 15,130 100,130 100,105 15,105
  pour Bottom: 15,130 100,130 100,105 15,105
GND4  (via drill 0.35)
  Top 0.152: U$5.2 37.33,153.15 R45.1 | U13.23 38.99,146.8 39.48,146.8 39.6,146.91 39.6,147.6
  other vias: 28,154 29,154 29,153 28,153 29,152 28,152 29,151 16.6,154 16.6,153 16.6,152 16.6,151 16.6,150 17.6,154 17.6,153 17.6,152 17.6,151 17.6,150 37,138.4 47.4,155 42.2,136.6 38.2,136.6 39.2,136.6 40.2,136.6 41.2,136.6
  pour Top: 15,160 100,160 100,135 15,135
  pour Bottom: 15,160 100,160 100,135 15,135
GND5  (via drill 0.35)
  Top 0.152: U$6.2 37.33,183.15 R56.1 | U16.23 38.99,176.8 39.48,176.8 39.6,176.91 39.6,177.6
  other vias: 28,184 29,184 29,183 28,183 29,182 28,182 29,181 16.6,184 16.6,183 16.6,182 16.6,181 16.6,180 17.6,184 17.6,183 17.6,182 17.6,181 17.6,180 37,168.4 47.4,185 42.2,166.6 38.2,166.6 39.2,166.6 40.2,166.6 41.2,166.6
  pour Top: 15,190 100,190 100,165 15,165
  pour Bottom: 15,190 100,190 100,165 15,165
LCL-M  (via drill 0.3, 0.35)  (1 unrouted)
  Top 0.152: U4.6 80.14,18.4 82.15,16.39 91.79,16.39 92.44,17.05 J2.1 | R8.1 64.53,24.79 | 64.53,24.79 65.43,24.79 R9.2 | v64.53,23.25 64.53,24.79
  Bottom 0.152: v64.53,23.25 68.87,18.79 91.09,18.79 91.97,17.9 v92.45,17.9
LCL-M1  (via drill 0.3, 0.35)  (1 unrouted)
  Top 0.152: U6.6 80.14,48.4 82.15,46.39 91.79,46.39 92.44,47.05 J4.1 | R19.1 64.53,54.79 | 64.53,54.79 65.43,54.79 R20.2 | v64.53,53.26 64.53,54.79
  Bottom 0.152: v64.53,53.26 68.87,48.79 91.09,48.79 91.97,47.9 v92.45,47.9
LCL-M2  (via drill 0.3, 0.35)  (1 unrouted)
  Top 0.152: U9.6 80.14,78.4 82.15,76.39 91.79,76.39 92.44,77.05 J6.1 | R30.1 64.53,84.79 | 64.53,84.79 65.43,84.79 R31.2 | v64.53,83.25 64.53,84.79
  Bottom 0.152: v64.53,83.25 68.87,78.79 91.09,78.79 91.97,77.9 v92.45,77.9
LCL-M3  (via drill 0.3, 0.35)  (1 unrouted)
  Top 0.152: U12.6 80.14,108.4 82.15,106.39 91.79,106.39 92.44,107.05 J8.1 | R41.1 64.53,114.79 | 64.53,114.79 65.43,114.79 R42.2 | v64.53,113.25 64.53,114.79
  Bottom 0.152: v64.53,113.25 68.87,108.79 91.09,108.79 91.97,107.9 v92.45,107.9
LCL-M4  (via drill 0.3, 0.35)  (1 unrouted)
  Top 0.152: U15.6 80.14,138.4 82.15,136.39 91.79,136.39 92.44,137.04 J10.1 | R52.1 64.53,144.79 | 64.53,144.79 65.43,144.79 R53.2 | v64.53,143.25 64.53,144.79
  Bottom 0.152: v64.53,143.25 68.87,138.79 91.09,138.79 91.97,137.9 v92.45,137.9
LCL-M5  (via drill 0.3, 0.35)  (1 unrouted)
  Top 0.152: U18.6 80.14,168.4 82.15,166.39 91.79,166.39 92.44,167.04 J12.1 | R63.1 64.53,174.79 | 64.53,174.79 65.43,174.79 R64.2 | v64.53,173.25 64.53,174.79
  Bottom 0.152: v64.53,173.25 68.87,168.79 91.09,168.79 91.97,167.9 v92.45,167.9
LCL-P  (via drill 0.3, 0.35)  (1 unrouted)
  Top 0.152: U4.7 80.07,18.9 82.27,16.7 90.5,16.7 91.2,17.4 91.2,19.98 J2.2 | R7.1 61,24.75 | 61,24.75 61.8,24.75 R8.2 | v60.97,23.25 60.97,24.72 61,24.75
  Bottom 0.152: v91.15,17.9 85.67,17.9 85.09,18.48 65.75,18.48 v60.97,23.25
LCL-P1  (via drill 0.3, 0.35)  (1 unrouted)
  Top 0.152: U6.7 80.07,48.9 82.27,46.7 90.5,46.7 91.2,47.4 91.2,49.98 J4.2 | R18.1 61,54.75 | 61,54.75 61.8,54.75 R19.2 | v60.97,53.26 60.97,54.72 61,54.75
  Bottom 0.152: v91.15,47.9 85.67,47.9 85.09,48.48 65.75,48.48 v60.97,53.26
LCL-P2  (via drill 0.3, 0.35)  (1 unrouted)
  Top 0.152: U9.7 80.07,78.9 82.27,76.69 90.5,76.69 91.2,77.4 91.2,79.97 J6.2 | R29.1 61,84.75 | 61,84.75 61.8,84.75 R30.2 | v60.97,83.25 60.97,84.72 61,84.75
  Bottom 0.152: v91.15,77.9 85.67,77.9 85.09,78.48 65.75,78.48 v60.97,83.25
LCL-P3  (via drill 0.3, 0.35)  (1 unrouted)
  Top 0.152: U12.7 80.07,108.9 82.27,106.69 90.5,106.69 91.2,107.4 91.2,109.97 J8.2 | R40.1 61,114.75 | 61,114.75 61.8,114.75 R41.2 | v60.97,113.25 60.97,114.72 61,114.75
  Bottom 0.152: v91.15,107.9 85.67,107.9 85.09,108.48 65.75,108.48 v60.97,113.25
LCL-P4  (via drill 0.3, 0.35)  (1 unrouted)
  Top 0.152: U15.7 80.07,138.9 82.27,136.69 90.5,136.69 91.2,137.4 91.2,139.97 J10.2 | R51.1 61,144.75 | 61,144.75 61.8,144.75 R52.2 | v60.97,143.25 60.97,144.72 61,144.75
  Bottom 0.152: v91.15,137.9 85.67,137.9 85.09,138.48 65.75,138.48 v60.97,143.25
LCL-P5  (via drill 0.3, 0.35)  (1 unrouted)
  Top 0.152: U18.7 80.07,168.9 82.27,166.69 90.5,166.69 91.2,167.4 91.2,169.97 J12.2 | R62.1 61,174.75 | 61,174.75 61.8,174.75 R63.2 | v60.97,173.25 60.97,174.72 61,174.75
  Bottom 0.152: v91.15,167.9 85.67,167.9 85.09,168.48 65.75,168.48 v60.97,173.25
LDA-M  (via drill 0.3, 0.35)  (1 unrouted)
  Top 0.152: J2.8 83.58,19.98 83.5,19.9 U4.9 | R5.1 54.24,24.89 | 54.24,24.89 55.02,24.89 R6.2 | v54.24,23.25 54.24,24.89
  Bottom 0.152: v83.55,17.9 59.6,17.9 v54.24,23.25
LDA-M1  (via drill 0.3, 0.35)  (1 unrouted)
  Top 0.152: J4.8 83.58,49.98 83.5,49.9 U6.9 | R16.1 54.24,54.9 | 54.24,54.9 55.02,54.9 R17.2 | v54.24,53.26 54.24,54.9
  Bottom 0.152: v83.55,47.9 59.6,47.9 v54.24,53.26
LDA-M2  (via drill 0.3, 0.35)  (1 unrouted)
  Top 0.152: J6.8 83.58,79.97 83.5,79.9 U9.9 | R27.1 54.24,84.89 | 54.24,84.89 55.02,84.89 R28.2 | v54.24,83.25 54.24,84.89
  Bottom 0.152: v83.55,77.9 59.6,77.9 v54.24,83.25
LDA-M3  (via drill 0.3, 0.35)  (1 unrouted)
  Top 0.152: J8.8 83.58,109.97 83.5,109.9 U12.9 | R38.1 54.24,114.89 | 54.24,114.89 55.02,114.89 R39.2 | v54.24,113.25 54.24,114.89
  Bottom 0.152: v83.55,107.9 59.6,107.9 v54.24,113.25
LDA-M4  (via drill 0.3, 0.35)  (1 unrouted)
  Top 0.152: J10.8 83.58,139.97 83.5,139.9 U15.9 | R49.1 54.24,144.9 | 54.24,144.9 55.02,144.9 R50.2 | v54.24,143.25 54.24,144.9
  Bottom 0.152: v83.55,137.9 59.6,137.9 v54.24,143.25
LDA-M5  (via drill 0.3, 0.35)  (1 unrouted)
  Top 0.152: J12.8 83.58,169.97 83.5,169.9 U18.9 | R60.1 54.24,174.9 | 54.24,174.9 55.02,174.9 R61.2 | v54.24,173.25 54.24,174.9
  Bottom 0.152: v83.55,167.9 59.6,167.9 v54.24,173.25
LDA-P  (via drill 0.3, 0.35)  (1 unrouted)
  Top 0.152: J2.7 84.85,19.98 84.85,17.45 84.4,17 82.4,17 80,19.4 U4.8 | R4.1 50.69,24.95 | 50.69,24.95 51.55,24.95 R5.2 | v50.69,23.25 50.69,24.95
  Bottom 0.152: v84.85,17.9 84.37,17.9 83.79,17.32 56.75,17.32 v50.69,23.25
LDA-P1  (via drill 0.3, 0.35)  (1 unrouted)
  Top 0.152: J4.7 84.85,49.98 84.85,47.45 84.4,47 82.4,47 80,49.4 U6.8 | R15.1 50.69,54.95 | 50.69,54.95 51.55,54.95 R16.2 | v50.69,53.26 50.69,54.95
  Bottom 0.152: v84.85,47.9 84.37,47.9 83.79,47.32 56.75,47.32 v50.69,53.26
LDA-P2  (via drill 0.3, 0.35)  (1 unrouted)
  Top 0.152: J6.7 84.85,79.97 84.85,77.45 84.4,77 82.4,77 80,79.4 U9.8 | R26.1 50.69,84.95 | 50.69,84.95 51.55,84.95 R27.2 | v50.69,83.25 50.69,84.95
  Bottom 0.152: v84.85,77.9 84.37,77.9 83.79,77.32 56.75,77.32 v50.69,83.25
LDA-P3  (via drill 0.3, 0.35)  (1 unrouted)
  Top 0.152: J8.7 84.85,109.97 84.85,107.45 84.4,107 82.4,107 80,109.4 U12.8 | R37.1 50.69,114.95 | 50.69,114.95 51.55,114.95 R38.2 | v50.69,113.25 50.69,114.95
  Bottom 0.152: v84.85,107.9 84.37,107.9 83.79,107.32 56.75,107.32 v50.69,113.25
LDA-P4  (via drill 0.3, 0.35)  (1 unrouted)
  Top 0.152: J10.7 84.85,139.97 84.85,137.45 84.4,137 82.4,137 80,139.4 U15.8 | R48.1 50.69,144.95 | 50.69,144.95 51.55,144.95 R49.2 | v50.69,143.25 50.69,144.95
  Bottom 0.152: v84.85,137.9 84.37,137.9 83.79,137.32 56.75,137.32 v50.69,143.25
LDA-P5  (via drill 0.3, 0.35)  (1 unrouted)
  Top 0.152: J12.7 84.85,169.97 84.85,167.45 84.4,167 82.4,167 80,169.4 U18.8 | R59.1 50.69,174.95 | 50.69,174.95 51.55,174.95 R60.2 | v50.69,173.25 50.69,174.95
  Bottom 0.152: v84.85,167.9 84.37,167.9 83.79,167.32 56.75,167.32 v50.69,173.25
N$1  (via drill 4.2 pad 6)
  other vias: 73.5,27.5
N$2  (via drill 4.2 pad 6)
  other vias: 73.5,57.5
N$3
  Top 0.152: C5.1 34.81,63.97 U$1.4
N$4  (via drill 4.2 pad 6)
  other vias: 73.5,87.5
N$5
  Top 0.152: C14.1 34.81,93.97 U$2.4
N$6
  Top 0.152: C8.1 34.81,33.97 U$4.4
N$7  (via drill 4.2 pad 6)
  other vias: 73.5,117.5
N$8
  Top 0.152: C20.1 34.81,123.97 U$3.4
N$9  (via drill 4.2 pad 6)
  other vias: 73.5,147.5
N$10
  Top 0.152: C26.1 34.81,153.97 U$5.4
N$11  (via drill 4.2 pad 6)
  other vias: 73.5,177.5
N$12
  Top 0.152: C32.1 34.81,183.97 U$6.4
RESET
  Top 0.152: X1.10 50.54,36.27 48.63,34.36 48.63,31.78 48.26,31.41 47.84,31.41 40.5,24.06 U2.18
RESET1
  Top 0.152: X2.10 50.54,66.27 48.63,64.37 48.63,61.78 48.26,61.41 47.84,61.41 40.5,54.06 U1.18
RESET2
  Top 0.152: X3.10 50.54,96.27 48.63,94.36 48.63,91.78 48.26,91.41 47.84,91.41 40.5,84.06 U7.18
RESET3
  Top 0.152: X4.10 50.54,126.27 48.63,124.36 48.63,121.78 48.26,121.41 47.84,121.41 40.5,114.06 U10.18
RESET4
  Top 0.152: X5.10 50.54,156.27 48.63,154.37 48.63,151.78 48.26,151.41 47.84,151.41 40.5,144.06 U13.18
RESET5
  Top 0.152: X6.10 50.54,186.27 48.63,184.37 48.63,181.78 48.26,181.41 47.84,181.41 40.5,174.06 U16.18
SCL
  Top 0.152: U2.12 34.81,24.75 32.81,22.75 32.81,21.38 29.36,17.93 U3.6 29.36,16.46 29,16.09 27.6,16.09 27.6,16.1 27.28,16.42 27.28,17.42 | J1.P$2 27.28,21.82 27.28,17.42 | R3.2 27.26,17.4 27.28,17.42
SCL1
  Top 0.152: U1.12 34.81,54.75 32.81,52.75 32.81,51.38 29.36,47.93 U5.6 29.36,46.46 29,46.09 27.6,46.09 27.6,46.1 27.28,46.42 27.28,47.42 | J3.P$2 27.28,51.82 27.28,47.42 | R14.2 27.26,47.4 27.28,47.42
SCL2
  Top 0.152: U7.12 34.81,84.75 32.81,82.75 32.81,81.38 29.36,77.93 U8.6 29.36,76.46 29,76.09 27.6,76.09 27.6,76.1 27.28,76.42 27.28,77.42 | J5.P$2 27.28,81.82 27.28,77.42 | R25.2 27.26,77.4 27.28,77.42
SCL3
  Top 0.152: U10.12 34.81,114.75 32.81,112.75 32.81,111.38 29.36,107.93 U11.6 29.36,106.46 29,106.09 27.6,106.09 27.6,106.1 27.28,106.42 27.28,107.42 | J7.P$2 27.28,111.82 27.28,107.42 | R36.2 27.26,107.4 27.28,107.42
SCL4
  Top 0.152: U13.12 34.81,144.75 32.81,142.75 32.81,141.38 29.36,137.93 U14.6 29.36,136.46 29,136.09 27.6,136.09 27.6,136.1 27.28,136.42 27.28,137.42 | J9.P$2 27.28,141.82 27.28,137.42 | R47.2 27.26,137.4 27.28,137.42
SCL5
  Top 0.152: U16.12 34.81,174.75 32.81,172.75 32.81,171.38 29.36,167.93 U17.6 29.36,166.46 29,166.09 27.6,166.09 27.6,166.1 27.28,166.42 27.28,167.42 | J11.P$2 27.28,171.82 27.28,167.42 | R58.2 27.26,167.4 27.28,167.42
SDA
  Top 0.152: U2.11 34.77,25.25 32.45,22.94 32.45,21.5 30.96,20 30.31,20 28.09,17.78 U3.5 28.09,20.95 27.58,21.46 27.58,24.06 J1.P$3 27.72,26.23 R2.2
SDA1
  Top 0.152: U1.11 34.77,55.25 32.45,52.94 32.45,51.5 30.96,50 30.31,50 28.09,47.78 U5.5 28.09,50.95 27.58,51.46 27.58,54.06 J3.P$3 27.72,56.23 R13.2
SDA2
  Top 0.152: U7.11 34.77,85.25 32.45,82.94 32.45,81.5 30.96,80 30.31,80 28.09,77.78 U8.5 28.09,80.95 27.58,81.46 27.58,84.06 J5.P$3 27.72,86.23 R24.2
SDA3
  Top 0.152: U10.11 34.77,115.25 32.45,112.94 32.45,111.5 30.96,110 30.31,110 28.09,107.78 U11.5 28.09,110.95 27.58,111.46 27.58,114.06 J7.P$3 27.72,116.23 R35.2
SDA4
  Top 0.152: U13.11 34.77,145.25 32.45,142.94 32.45,141.5 30.96,140 30.31,140 28.09,137.78 U14.5 28.09,140.95 27.58,141.46 27.58,144.06 J9.P$3 27.72,146.23 R46.2
SDA5
  Top 0.152: U16.11 34.77,175.25 32.45,172.94 32.45,171.5 30.96,170 30.31,170 28.09,167.78 U17.5 28.09,170.95 27.58,171.46 27.58,174.06 J11.P$3 27.72,176.23 R57.2
SENSE-SCL
  Top 0.152: U4.4 35.74,18.9 37.25,20.4 37.25,22.75 | 37.25,22.75 U2.16 | R11.2 37.27,22.76 37.25,22.75
SENSE-SCL1
  Top 0.152: U6.4 35.74,48.9 37.25,50.4 37.25,52.75 | 37.25,52.75 U1.16 | R22.2 37.27,52.76 37.25,52.75
SENSE-SCL2
  Top 0.152: U9.4 35.74,78.9 37.25,80.4 37.25,82.75 | 37.25,82.75 U7.16 | R33.2 37.27,82.76 37.25,82.75
SENSE-SCL3
  Top 0.152: U12.4 35.74,108.9 37.25,110.4 37.25,112.75 | 37.25,112.75 U10.16 | R44.2 37.27,112.76 37.25,112.75
SENSE-SCL4
  Top 0.152: U15.4 35.74,138.9 37.25,140.4 37.25,142.75 | 37.25,142.75 U13.16 | R55.2 37.27,142.76 37.25,142.75
SENSE-SCL5
  Top 0.152: U18.4 35.74,168.9 37.25,170.4 37.25,172.75 | 37.25,172.75 U16.16 | R66.2 37.27,172.76 37.25,172.75
SENSE-SDA
  Top 0.152: U4.2 35.79,19.9 36.75,20.85 36.75,22 | 36.75,22 U2.15 | R10.2 35.88,22 36.75,22
SENSE-SDA1
  Top 0.152: U6.2 35.79,49.9 36.75,50.85 36.75,52 | 36.75,52 U1.15 | R21.2 35.88,52 36.75,52
SENSE-SDA2
  Top 0.152: U9.2 35.79,79.9 36.75,80.85 36.75,82 | 36.75,82 U7.15 | R32.2 35.88,82 36.75,82
SENSE-SDA3
  Top 0.152: U12.2 35.79,109.9 36.75,110.85 36.75,112 | 36.75,112 U10.15 | R43.2 35.88,112 36.75,112
SENSE-SDA4
  Top 0.152: U15.2 35.79,139.9 36.75,140.85 36.75,142 | 36.75,142 U13.15 | R54.2 35.88,142 36.75,142
SENSE-SDA5
  Top 0.152: U18.2 35.79,169.9 36.75,170.85 36.75,172 | 36.75,172 U16.15 | R65.2 35.88,172 36.75,172
SWCLK
  Top 0.152: X1.4 46.73,36.27 44,33.54 44,29.12 39.63,24.75 U2.19
SWCLK1
  Top 0.152: X2.4 46.73,66.27 44,63.54 44,59.12 39.63,54.75 U1.19
SWCLK2
  Top 0.152: X3.4 46.73,96.27 44,93.54 44,89.12 39.63,84.75 U7.19
SWCLK3
  Top 0.152: X4.4 46.73,126.27 44,123.54 44,119.12 39.63,114.75 U10.19
SWCLK4
  Top 0.152: X5.4 46.73,156.27 44,153.54 44,149.12 39.63,144.75 U13.19
SWCLK5
  Top 0.152: X6.4 46.73,186.27 44,183.54 44,179.12 39.63,174.75 U16.19
SWDIO
  Top 0.152: X1.2 42.47,33.96 42.47,28.08 39.63,25.25 U2.20
SWDIO1
  Top 0.152: X2.2 42.47,63.96 42.47,58.08 39.63,55.25 U1.20
SWDIO2
  Top 0.152: X3.2 42.47,93.96 42.47,88.08 39.63,85.25 U7.20
SWDIO3
  Top 0.152: X4.2 42.47,123.96 42.47,118.08 39.63,115.25 U10.20
SWDIO4
  Top 0.152: X5.2 42.47,153.96 42.47,148.08 39.63,145.25 U13.20
SWDIO5
  Top 0.152: X6.2 42.47,183.96 42.47,178.08 39.63,175.25 U16.20
UNREG
  Top 0.406: J1.P$7 19.59,35.59 21,37 39,37 | 39,37 41,35 41,32 40,31 38.23,31 U$4.1 | 39,37 43.43,37 44.93,38.51 72.77,38.51 88.6,22.68 88.6,20.04 J2.4 J2.3
UNREG1
  Top 0.406: J3.P$7 19.59,65.59 21,67 39,67 | 39,67 41,65 41,62 40,61 38.23,61 U$1.1 | 39,67 43.43,67 44.93,68.51 72.77,68.51 88.6,52.68 88.6,50.03 J4.4 J4.3
UNREG2
  Top 0.406: J5.P$7 19.59,95.59 21,97 39,97 | 39,97 41,95 41,92 40,91 38.23,91 U$2.1 | 39,97 43.43,97 44.93,98.51 72.77,98.51 88.6,82.68 88.6,80.03 J6.4 J6.3
UNREG3
  Top 0.406: J7.P$7 19.59,125.59 21,127 39,127 | 39,127 41,125 41,122 40,121 38.23,121 U$3.1 | 39,127 43.43,127 44.93,128.51 72.77,128.51 88.6,112.68 88.6,110.03 J8.4 J8.3
UNREG4
  Top 0.406: J9.P$7 19.59,155.59 21,157 39,157 | 39,157 41,155 41,152 40,151 38.23,151 U$5.1 | 39,157 43.43,157 44.93,158.51 72.77,158.51 88.6,142.68 88.6,140.03 J10.4 J10.3
UNREG5
  Top 0.406: J11.P$7 19.59,185.59 21,187 39,187 | 39,187 41,185 41,182 40,181 38.23,181 U$6.1 | 39,187 43.43,187 44.93,188.51 72.77,188.51 88.6,172.68 88.6,170.03 J12.4 J12.3
WC
  Top 0.152: U2.13 34.61,24.06 33.11,22.57 33.11,21.14 30.64,18.66 U3.7
WC1
  Top 0.152: U1.13 34.61,54.06 33.11,52.57 33.11,51.14 30.64,48.66 U5.7
WC2
  Top 0.152: U7.13 34.61,84.06 33.11,82.57 33.11,81.14 30.64,78.66 U8.7
WC3
  Top 0.152: U10.13 34.61,114.06 33.11,112.57 33.11,111.14 30.64,108.66 U11.7
WC4
  Top 0.152: U13.13 34.61,144.06 33.11,142.57 33.11,141.14 30.64,138.66 U14.7
WC5
  Top 0.152: U16.13 34.61,174.06 33.11,172.57 33.11,171.14 30.64,168.66 U17.7

## Text on the board
Top: DARWIN+WEATHER+MODULE+PA1